# Altium PCB NodeController2.PcbDoc
Units mm, origin at the board's own origin, x right, y up, seen from the top; angles counter-clockwise.
Board outline 152.4 x 101.6 mm, 2 copper layers (Top Layer, Bottom Layer); 33 components, 28 nets, 149 pads, 2 vias.
Unrouted connection lines stored in the file: 41.
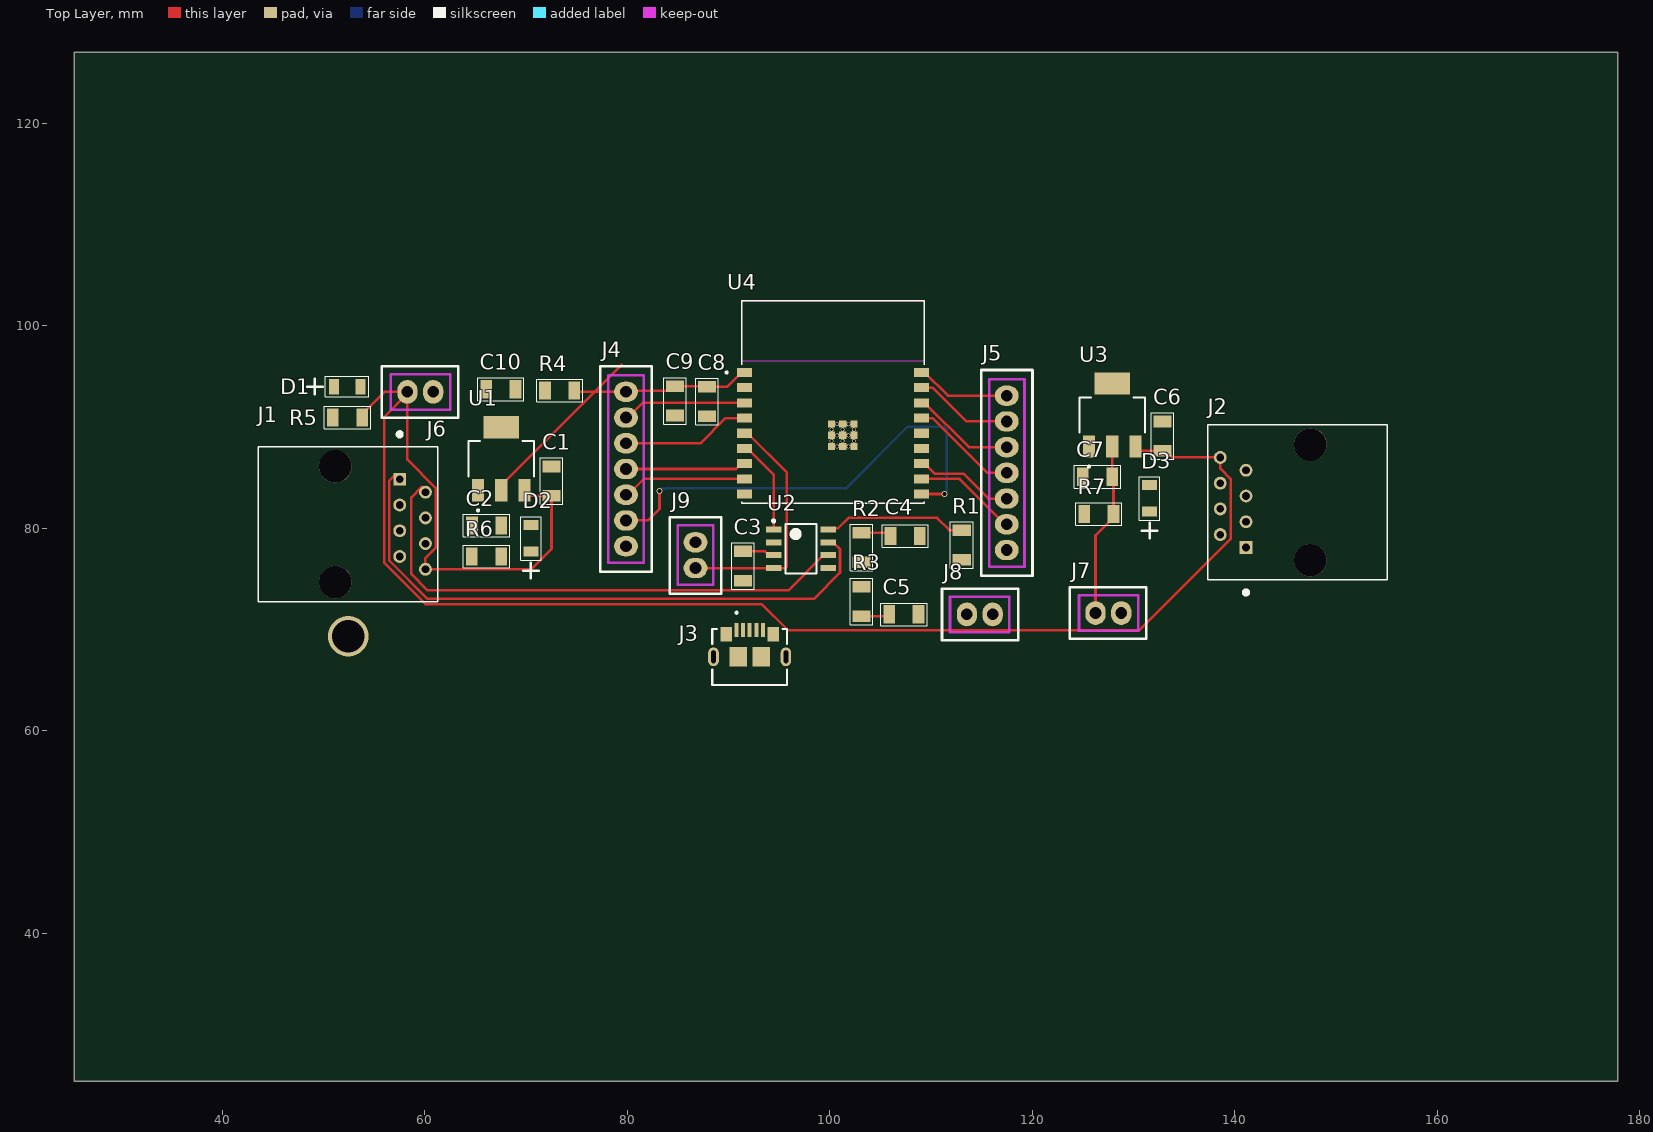
[diagram p0: Top Layer view]
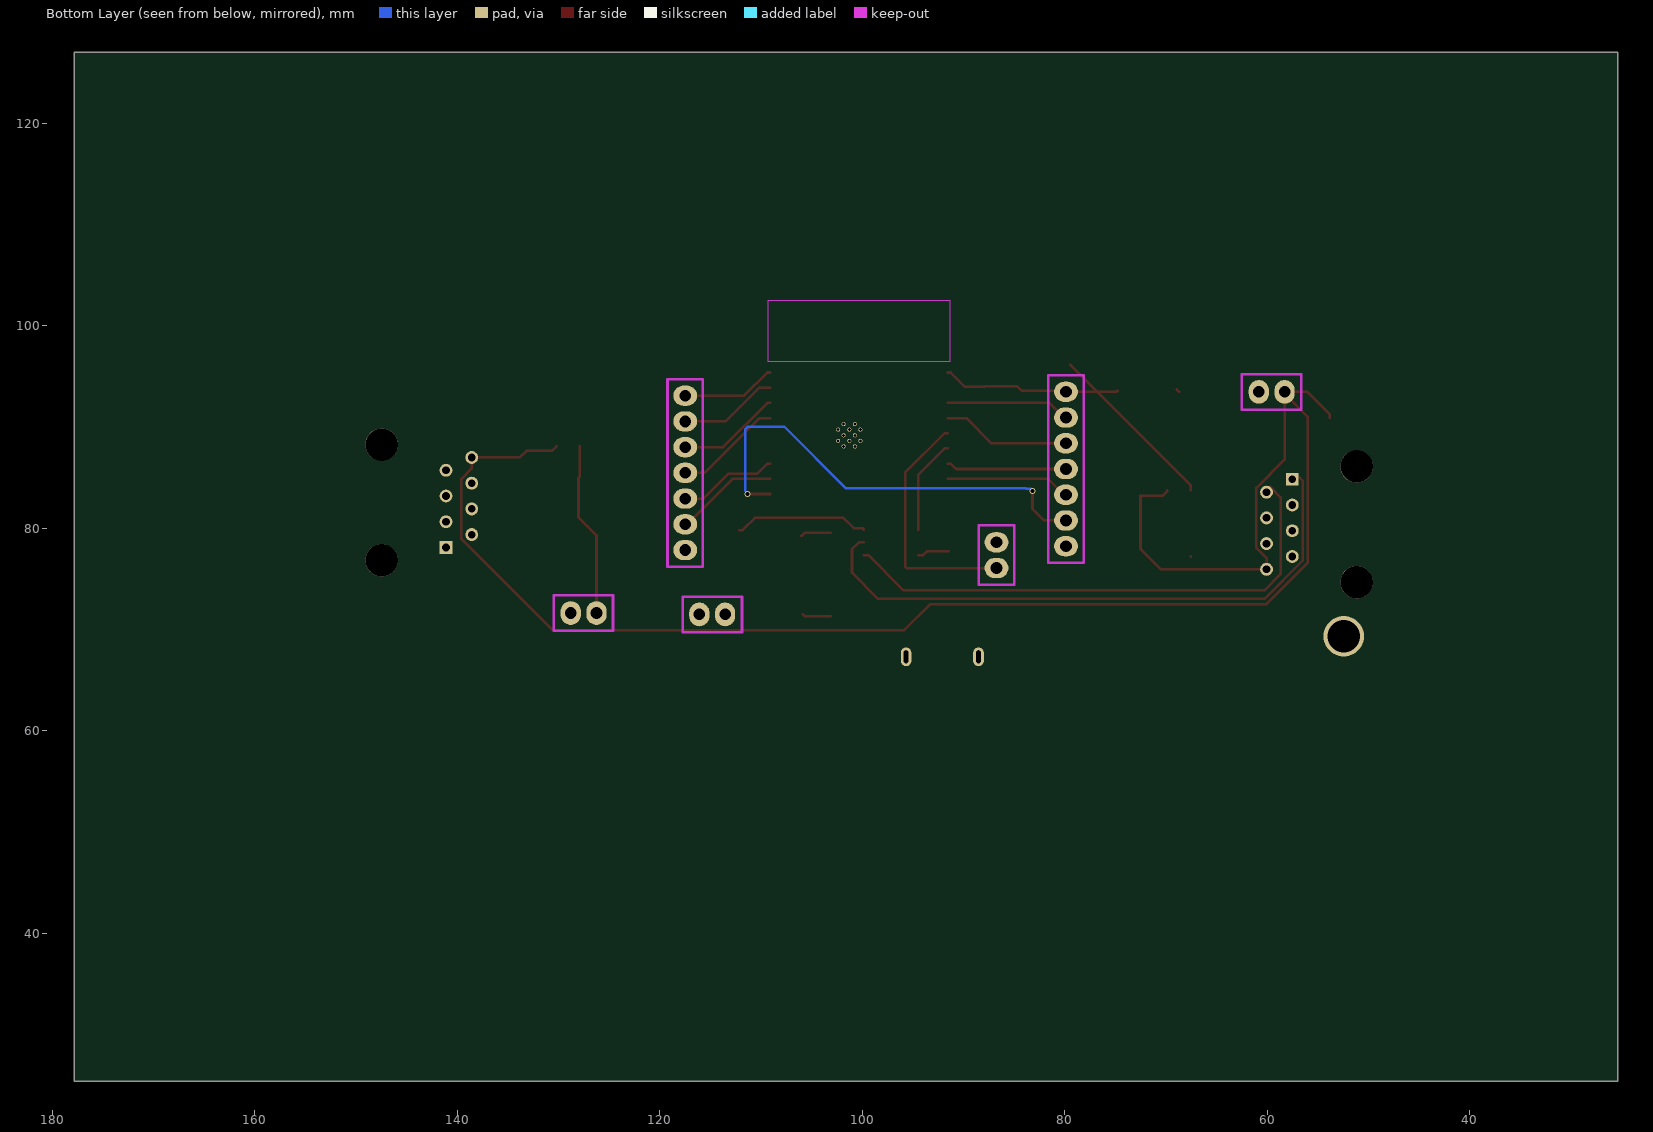
[diagram p1: Bottom Layer view, seen from below]

## Layer stack, top to bottom
Top Solder: solder mask 0.0102, Solder Resist, Dk 3.5
Top Layer: signal copper 0.0356
Dielectric 1: dielectric 0.32, FR-4, Dk 4.8
Bottom Layer: signal copper 0.0356
Bottom Solder: solder mask 0.0102, Solder Resist, Dk 3.5

## Board outline
25.4,25.4 177.8,25.4 177.8,127 25.4,127

## Design rules (kind name [scope] priority, off if disabled: settings)
Clearance [All] p1: gap=0.254 ignorepadtopadclearanceinfootprint=FALSE
PolygonConnect [All] p1: connectstyle=Relief reliefconductorwidth=0.254 reliefentries=4 polygonreliefangle="90 Angle" airgapwidth=0.254
RoutingVias [All] p1: holewidth=0.711 width=1.27 viastyle="Through Hole" minholewidth=0.711 minwidth=1.27 maxholewidth=0.711 maxwidth=1.27
SolderMaskExpansion [All] p1: expansion=0.102 istentingtop=FALSE
Width [All] p1: maxlimit=0.254 minlimit=0.254 preferedwidth=0.254
30 further rules are at their usual default settings.

## Components (designator, comment, footprint, x,y, rotation, side; value= is the part's Value field where it differs from the comment)
C1 "10uF" Resistor/Cap-1206 72.517,84.656 r270 top value=100pF
C2 "22uF" Resistor/Cap-1206 66.114,80.264 r0 top value=100pF
C3 "0.1uF" Resistor/Cap-1206 91.44,76.274 r90 top value=100pF
C4 "560pF" Resistor/Cap-1206 107.442,79.248 r0 top value=100pF
C5 "560pF" Resistor/Cap-1206 107.315,71.501 r0 top value=100pF
C6 "10uF" Resistor/Cap-1206 132.842,89.101 r270 top value=100pF
C7 "22uF" Resistor/Cap-1206 126.439,85.09 r0 top value=100pF
C8 "10uF" Resistor/Cap-1206 87.884,92.509 r270 top value=100pF
C9 "0.1uF" Resistor/Cap-1206 84.709,92.583 r270 top value=100pF
C10 "10uF" Resistor/Cap-1206 67.511,93.726 r180 top value=100pF
D1 "LED" LED-1206 53.724,93.98 r180 top
D2 "LED" LED-1206 70.485,80.391 r270 top
D3 "LED" LED-1206 131.572,84.331 r270 top
J1 "54602-908LF" AMPHENOL_54602-908LF 51.181,80.391 r270 top
J2 "54602-908LF" AMPHENOL_54602-908LF 147.447,82.55 r90 top
J3 "USB3076-XX-X_REVC5" GCT_USB3076-XX-X_REVC5 92.093,67.31 r0 top
J4 "CON7X1" CON7X1 79.883,93.472 r270 top
J5 "CON7X1" CON7X1 117.475,93.091 r270 top
J6 "CON2X1" CON2X1 58.293,93.472 r0 top
J7 "CON2X1" CON2X1 126.238,71.628 r0 top
J8 "CON2X1" CON2X1 116.078,71.501 r180 top
J9 "CON2X1" CON2X1 86.741,76.073 r90 top
R1 "4.7K" Resistor/Cap-1206 113.03,78.359 r90 top
R2 "100" Resistor/Cap-1206 103.124,78.105 r90 top
R3 "100" Resistor/Cap-1206 103.124,72.771 r270 top
R4 "10K" Resistor/Cap-1206 73.332,93.599 r180 top
R5 "1k" Resistor/Cap-1206 52.377,90.932 r180 top
R6 "1k" Resistor/Cap-1206 66.093,77.216 r180 top
R7 "1k" Resistor/Cap-1206 126.566,81.407 r180 top
U1 "AZ1117IH-3.3TRG1" SOT230P700X185-4N 67.564,86.868 r90 top
U2 "MCP2551-I/SN" MCP2551 97.155,77.978 r0 top
U3 "AZ1117IH-5TRG1" SOT230P700X185-4N 127.889,91.186 r90 top
U4 "ESP32-C3-WROOM-02" MODULE_ESP32-C3-WROOM-02-H4 100.317,92.484 r0 top

## Footprints (in the part's own frame and the unit in brackets; to place one, negate y for a bottom-side part, rotate by r counter-clockwise, add the part's x,y. Pads: shape width x height; smd on the part's side, far side on the other; paste and mask are expansions set on the pad)
AMPHENOL_54602-908LF [mm]
  rect 1.268x1.268 / inner round 1.268 / far side rect 1.268x1.268 hole 0.76: 1(-4.445,6.35)
  round 1.268 hole 0.76: 2(-3.175,8.89) 3(-1.905,6.35) 4(-0.635,8.89) 5(0.635,6.35) 6(1.905,8.89) 7(3.175,6.35) 8(4.445,8.89)
  round 3.2 hole 3.2 unplated: ""(-5.715,0) ""(5.715,0)
  silkscreen extent -9.09,-7.62 7.65,10.12, body extent -7.65,-7.62 7.65,10.12, height 12.7
CON2X1 [mm] "2.54mm based header"
  oval 2x2.35 hole 1.15: 0(0,0) 1(2.54,0)
  Keep-Out Layer lines w0.254: -1.63,-1.75 -1.63,1.75 4.21,1.75 4.21,-1.75 -1.63,-1.75
  silkscreen extent -2.54,-2.54 5,2.54
CON7X1 [mm] "2.54mm based header"
  oval 2x2.35 hole 1.15: 0(0,0) 1(2.54,0) 2(5.08,0) 3(7.62,0) 4(10.16,0) 5(12.7,0) 6(15.24,0)
  Keep-Out Layer lines w0.254: 16.87,-1.75 -1.63,-1.75 -1.63,1.75 16.87,1.75 16.87,-1.75
  silkscreen extent -2.54,-2.54 17.78,2.54
GCT_USB3076-XX-X_REVC5 [mm]
  rect 0.4x1.4 smd: 1(-1.3,2.65) 2(-0.65,2.65) 3(0,2.65) 4(0.65,2.65) 5(1.3,2.65)
  oval 1.05x1.85 hole 0.45 slot 1.252 at 90 deg: 6(-3.575,0) 7(3.575,0)
  rect 1.15x1.45 smd: 8(-2.32,2.23) 9(2.32,2.23)
  rect 1.75x1.9 smd: 10(-1.125,0) 11(1.125,0)
  silkscreen extent -3.7,-2.8 3.7,4.45, body extent -3.7,-2.78 3.7,2.78, height 2.66
LED-1206 [mm]
  rect 1x1.5 smd: 1(0.074,0) 1(2.67,0)
  silkscreen extent -0.76,-1.02 5.33,1.02
MCP2551 [mm] "SOIC, 8-Leads, Body 4.9x3.9mm, Pitch 1.27mm"
  rect 1.55x0.6 smd: 1(-2.7,1.905) 2(-2.7,0.635) 3(-2.7,-0.635) 4(-2.7,-1.905) 5(2.7,-1.905) 6(2.7,-0.635) 7(2.7,0.635) 8(2.7,1.905)
  silkscreen extent -2.82,-2.45 1.53,2.88, body extent -3,-2.45 3,2.45, height 1.75
MODULE_ESP32-C3-WROOM-02-H4 [mm]
  rect 1.5x0.9 smd: 1(-8.75,2.9) 2(-8.75,1.4) 3(-8.75,-0.1) 4(-8.75,-1.6) 5(-8.75,-3.1) 6(-8.75,-4.6) 7(-8.75,-6.1) 8(-8.75,-7.6) 9(-8.75,-9.1) 10(8.75,-9.1) 11(8.75,-7.6) 12(8.75,-6.1) 13(8.75,-4.6) 14(8.75,-3.1) 15(8.75,-1.6) 16(8.75,-0.1) 17(8.75,1.4) 18(8.75,2.9)
  rect 0.7x0.7 smd: 19(-0.14,-2.2) 20(0.96,-2.2) 21(2.06,-2.2) 22(-0.14,-3.3) 23(0.96,-3.3) 24(2.06,-3.3) 25(-0.14,-4.4) 26(0.96,-4.4) 27(2.06,-4.4)
  round 0.4 hole 0.3 mask+0: 28(0.41,-2.2) 29(1.51,-2.2) 30(-0.14,-2.75) 31(0.96,-2.75) 32(2.06,-2.75) 33(0.41,-3.3) 34(1.51,-3.3) 35(-0.14,-3.85) 36(0.96,-3.85) 37(2.06,-3.85) 38(0.41,-4.4) 39(1.51,-4.4)
  Keep-Out Layer region: 9,4 -9,4 -9,10 9,10
  Keep-Out Layer region: 9,4 -9,4 -9,10 9,10
  silkscreen extent -10.6,-10 9,10, body extent -9,-10 9,10, height 3.35
Resistor/Cap-1206 [mm]
  rect 1.15x1.8 smd: 1(-1.45,0) 2(1.45,0)
  silkscreen extent -2.29,-1.12 2.29,1.12
SOT230P700X185-4N [mm]
  rect 2.2x1.2 smd: 1(-3.1,2.3) 2(-3.1,0) 3(-3.1,-2.3)
  rect 2.2x3.5 smd: 4(3.1,0)
  silkscreen extent -5.2,-3.25 1.75,3.25, body extent -3.5,-3.25 3.5,3.25, height 1.65

## Part data
C1 C2 C3 C4 C5 C6 C7 C8 C9 C10: library part Cap, "Capacitor", LatestRevisionDate=17-Jul-2002, LatestRevisionNote="Re-released for DXP Platform.", PackageDescription="Radial Cap, Thru-Hole; 2 Leads; 0.3 in Pin Spacing", PackageReference=RAD-0.3, Published=8-Jun-2000, Publisher="Altium Limited"
D1 D2 D3: "Light Emitting Diode LED"
J1 J2: "No Description Available", Mfr_Name="Amphenol ICC", Copyright="Copyright (C) 2024 Ultra Librarian. All rights reserved.", Manufacturer_Part_Number=54602-908LF, RefDes=RefDes, Type=DEV
J3: "USB - micro B USB 2.0 Receptacle Connector 5 Position Surface Mount, Right Angle; Through Hole, 2.35mm profile, 5 Pins, Horizontal, Bottom mount", Package=None, Availability="In Stock", Check_prices=https://www.snapeda.com/parts/USB3076-30-A/Global+Connector+Technology/view-part/?ref=eda, MF="Global Connector Technology", MP=USB3076-30-A, Price=None, Purchase-URL=https://pricing.snapeda.com/search/part/USB3076-30-A/?ref=eda, SnapEDA_Link=https://www.snapeda.com/parts/USB3076-30-A/Global+Connector+Technology/view-part/?ref=snap
R1 R2 R3 R4 R5 R6 R7: library part RES1, "Resistor"
U1: library part AZ1117IH-3.3TRG1_1, "No Description Available", Mfr_Name="Diodes Inc", RefDes=RefDes, Type=Type
U2: "High-Speed CAN Transceiver, /  1 Mb/s, 4.5 to 5.5 V, 8-Pin SOIC (SN), Industrial Temperature, RoHS, Tube", Manufacturer=Microchip, ComponentLink1Description="Manufacturer URL", ComponentLink1URL=http://www.microchip.com/, ComponentLink2Description=Datasheet, ComponentLink2URL=http://ww1.microchip.com/downloads/en/DeviceDoc/21667f.pdf, ComponentLink3Description="Package Specification", ComponentLink3URL=http://www.microchip.com/stellent/groups/techpub_sg/documents/packagingspec/en012702.pdf, DatasheetVersion="Rev. F, 07/2010", Mounting Technology="Surface Mount", PackageDescription="8-Pin Small Outline Integrated Circuit, Body 4.9 x 3.9 mm, Pitch 1.27 mm", PackageReference=SN8, RoHSCompliant=true
U3: library part AZ1117IH-5TRG1_1_1, "No Description Available", Mfr_Name="Diodes Inc", RefDes=RefDes, Type=Type
U4: Datasheet=https://www.espressif.com/sites/default/files/documentation/esp32-c3-wroom-02_datasheet_en.pdf, ki_description="ESP32-C3-WROOM-02 is a general-purpose Wi-Fi and Bluetooth LE module. This module features a rich set of peripherals and high performance, which makes it an ideal choice for smart home, industrial automation, health care, consumer electronics, etc.", ki_keywords="esp32-c3 module", Reference=U

## Free pads (board coordinates)
  round 4 hole 3.2: 1(52.451,69.342)

## Via types
v1: diameter 0.6, hole 0.4, Top Layer to Bottom Layer, 1 vias
v2: diameter 0.6, hole 0.4, Top Layer to Bottom Layer, tented top, 1 vias

## Nets (pads, with @x,y where several pads share a name; then routed paths per layer and width w, separated by ;. In a path a pad name is that pad's centre, name@x,y a point inside that pad or via, vN(x,y) a via of type N, cw(c..) or ccw(c..) an arc to the next point about the centre after c; other vN are vias at no path point)
+3.3: C2.2 C8.1 C9.1 J4.0 R4.1 R6.1 U1.2 U4.1 | length 35
  Top Layer w0.254: R6.1 R6.1@67.564,77.237 ; U1.2 67.564,84.268 79.435,96.139 ; R4.1 74.909,93.472 79.308,93.472 J4.0 79.996,93.585 84.261,93.585 C9.1 87.81,94.033 C8.1 89.842,93.959 91.267,95.384 U4.1
+5: C3.2 C7.2 J7.0 R7.1 U2.3 U3.2 | length 20.4
  Top Layer w0.254: C3.2 93.599,77.724 93.98,77.343 U2.3 ; J7.0 126.238,79.304 128.016,81.082 R7.1 128.016,84.963 C7.2 U3.2
+12: C1.2 C6.2 J1.8 J2.8 J6.0 R5.1 U1.3 U3.3 | length 170.9
  Top Layer w0.254: R5.1 53.827,91.257 56.042,93.472 J6.0 J6.0@58.293,93.297 ; J1.8 60.071,77.051 61.086,78.066 61.086,83.986 58.293,86.779 J6.0@58.293,93.297 ; J1.8@60.483,75.935 70.488,75.935 72.517,77.964 C1.2 70.337,83.206 69.864,83.679 U1.3 ; U3.3 130.624,87.651 C6.2 133.167,87.651 133.823,86.995 J2.8 138.557,85.89 139.572,84.875 139.572,78.955 130.562,69.945 95.847,69.945 93.275,72.517 60.076,72.517 56.008,76.585 56.008,91.012 J6.0@58.293,93.297
GND: C1.1 C2.1 C3.1 C4.2 C5.2 C6.1 C7.1 C8.2 C9.2 C10.2 J1.7 J2.7 J3.5 J3.6 J3.7 J3.8 J3.9 J3.10 J3.11 J4.6 J5.6 J6.1 J7.1 R1.1 U1.1 U2.2 U3.1 U4.19
NetC4_1: C4.1 R2.2 | length 3
  Top Layer w0.254: R2.2 105.685,79.555 C4.1
NetC5_1: C5.1 R3.2 | length 2.8
  Top Layer w0.254: R3.2 105.685,71.321 C5.1
NetC10_1: C10.1 R4.2 U4.2 | length 0.4
  Top Layer w0.254: C10.1@68.707,93.472 C10.1
NetD1_A: R5.2
NetD2_A: R6.2
NetD3_A: R7.2
NetJ1_1: J1.1 J2.1 J8.0 R2.1 U2.7 | length 59.7
  Top Layer w0.254: J1.1@57.15,85.344 56.516,84.71 56.516,76.796 60.287,73.025 98.421,73.025 101.011,75.615 101.011,77.932 100.33,78.613 U2.7
NetJ1_2: J1.2 J2.2 J8.1 R3.1 U2.6 | length 52.3
  Top Layer w0.254: 59.69,84.074 58.675,83.059 58.675,75.477 60.284,73.868 95.905,73.868 99.38,77.343 U2.6
NetJ3_2: J3.2 U4.13
NetJ3_3: J3.3 U4.14
NetJ4_1: J4.1 U4.3 | length 12.3
  Top Layer w0.254: J4.1 80.058,90.932 81.51,92.384 U4.3
NetJ4_2: J4.2 U4.4 | length 12.7
  Top Layer w0.254: J4.2 87.231,88.392 89.723,90.884 U4.4
NetJ4_3: J4.3 U4.7 | length 11.9
  Top Layer w0.254: J4.3 90.735,85.852 91.267,86.384 U4.7
NetJ4_4: J4.4 U4.8 | length 12.3
  Top Layer w0.254: J4.4 80.058,83.312 81.63,84.884 U4.8
NetJ4_5: J4.5 U4.10 | length 45.4
  Top Layer w0.254: J4.5 82.042,80.772 83.185,81.915 v1(83.185,83.693) ; U4.10 v2(111.324,83.384) v2@111.342,83.402
  Bottom Layer w0.254: v1(83.185,83.693) 83.379,83.887 83.782,83.887 83.842,83.947 101.6,83.947 107.696,90.043 111.279,90.043 111.555,89.767 111.555,83.706 111.324,83.475 v2(111.324,83.384)
NetJ5_0: J5.0 U4.18 | length 9.4
  Top Layer w0.254: U4.18 109.367,95.384 111.66,93.091 J5.0
NetJ5_1: J5.1 U4.17 | length 9.8
  Top Layer w0.254: U4.17 110.149,93.884 113.482,90.551 J5.1
NetJ5_2: J5.2 U4.16 | length 10.2
  Top Layer w0.254: U4.16 109.367,92.384 113.74,88.011 J5.2
NetJ5_3: J5.3 U4.15 | length 10.7
  Top Layer w0.254: U4.15 110.149,90.884 115.562,85.471 J5.3
NetJ5_4: J5.4 U4.12 | length 9.8
  Top Layer w0.254: U4.12 109.367,86.384 110.359,85.392 113.192,85.392 115.653,82.931 J5.4
NetJ5_5: J5.5 U4.11 | length 10.3
  Top Layer w0.254: U4.11 112.807,84.884 117.3,80.391 J5.5
NetJ9_0: J9.0 U2.4 U4.5 | length 24.2
  Top Layer w0.254: J9.0@86.808,76.006 J9.0 U2.4 95.611,76.073 95.76,76.222 95.76,85.491 91.867,89.384 U4.5
NetJ9_1: J9.1 U2.1 U4.6 | length 9.4
  Top Layer w0.254: U4.6 91.867,87.884 94.455,85.296 U2.1
NetR1_2: R1.2 U2.8 | length 13.3
  Top Layer w0.254: U2.8 99.98,80.008 100.836,80.008 101.854,81.026 110.599,81.026 111.816,79.809 R1.2@112.141,79.809
pads on no net: D1.1 D2.1 D3.1 J1. J1.3 J1.4 J1.5 J1.6 J2. J2.3 J2.4 J2.5 J2.6 J3.1 J3.4 U1.4 U2.5 U3.4 U4.9 U4.20 U4.21 U4.22 U4.23 U4.24 U4.25 U4.26 U4.27 U4.28 U4.29 U4.30 U4.31 U4.32 U4.33 U4.34 U4.35 U4.36 U4.37 U4.38 U4.39

## Silkscreen, mask and mechanical layers (free items; w line width, h text height)
Mechanical 1:
  lines w0.254: 46.228,65.913 150.749,65.913 150.749,96.52 46.228,96.52 46.228,65.913

## Dimensions
150.749,65.913 to 150.749,96.52 on Mechanical 1
46.228,96.52 to 150.749,96.52 on Mechanical 1